# EAGLE board baseBoard2 (EAGLE 9.6.2)
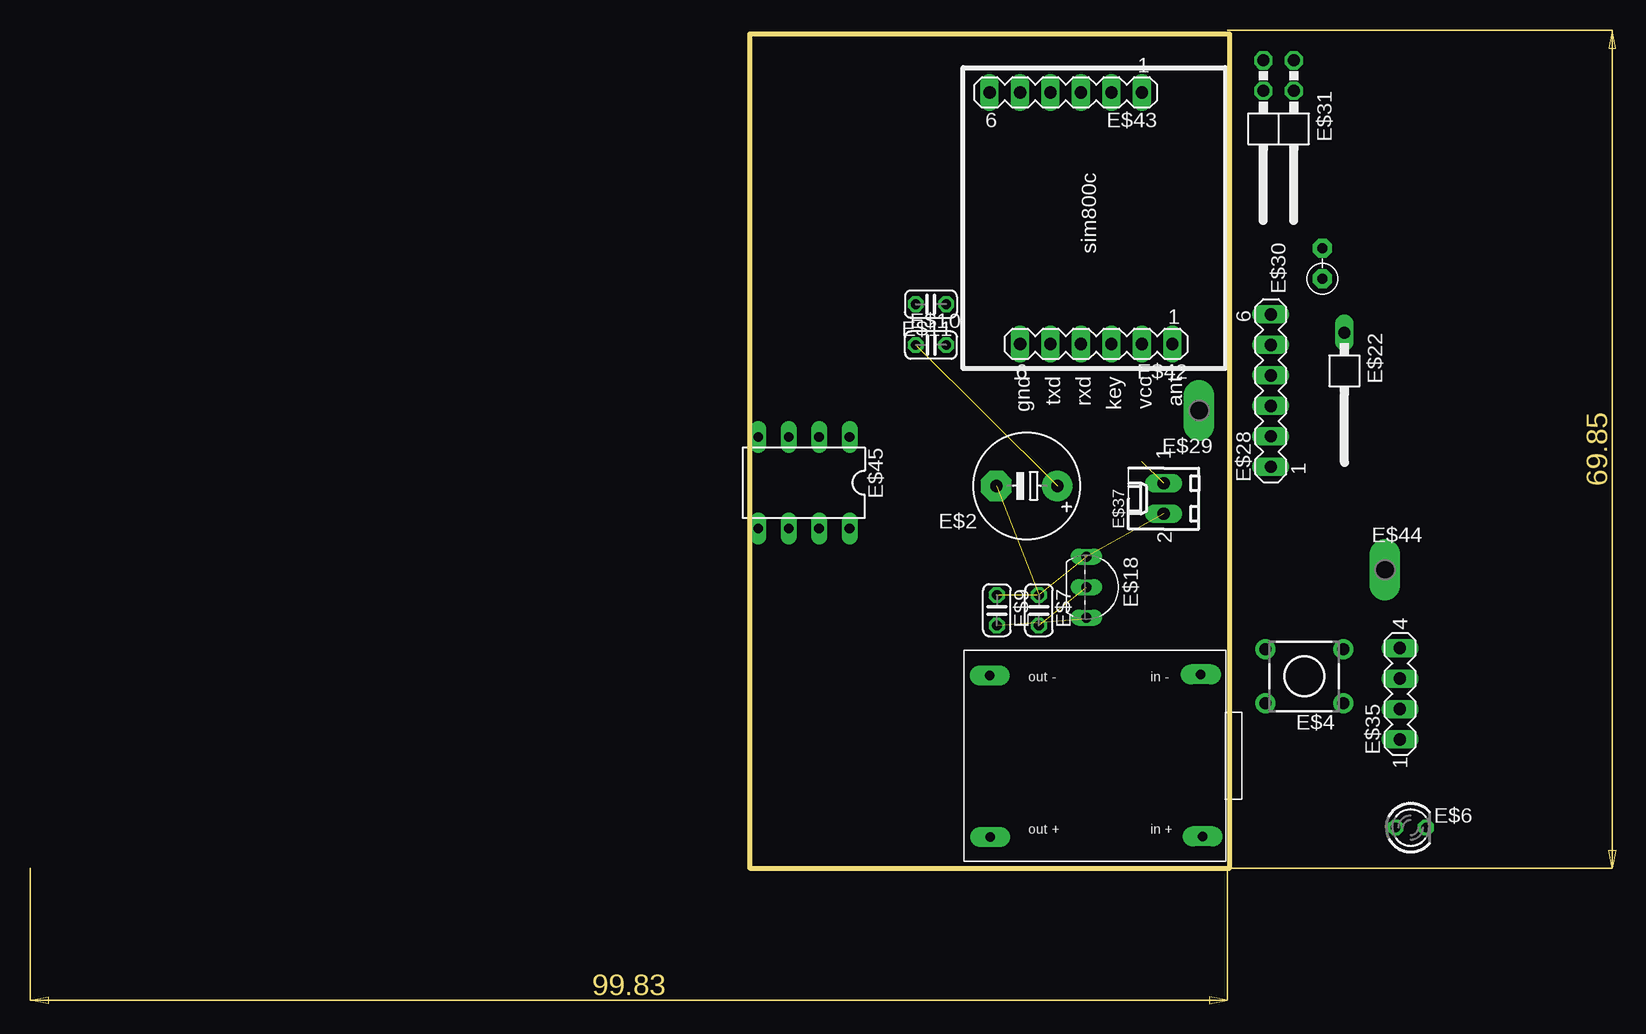
[diagram p0: board, top side]
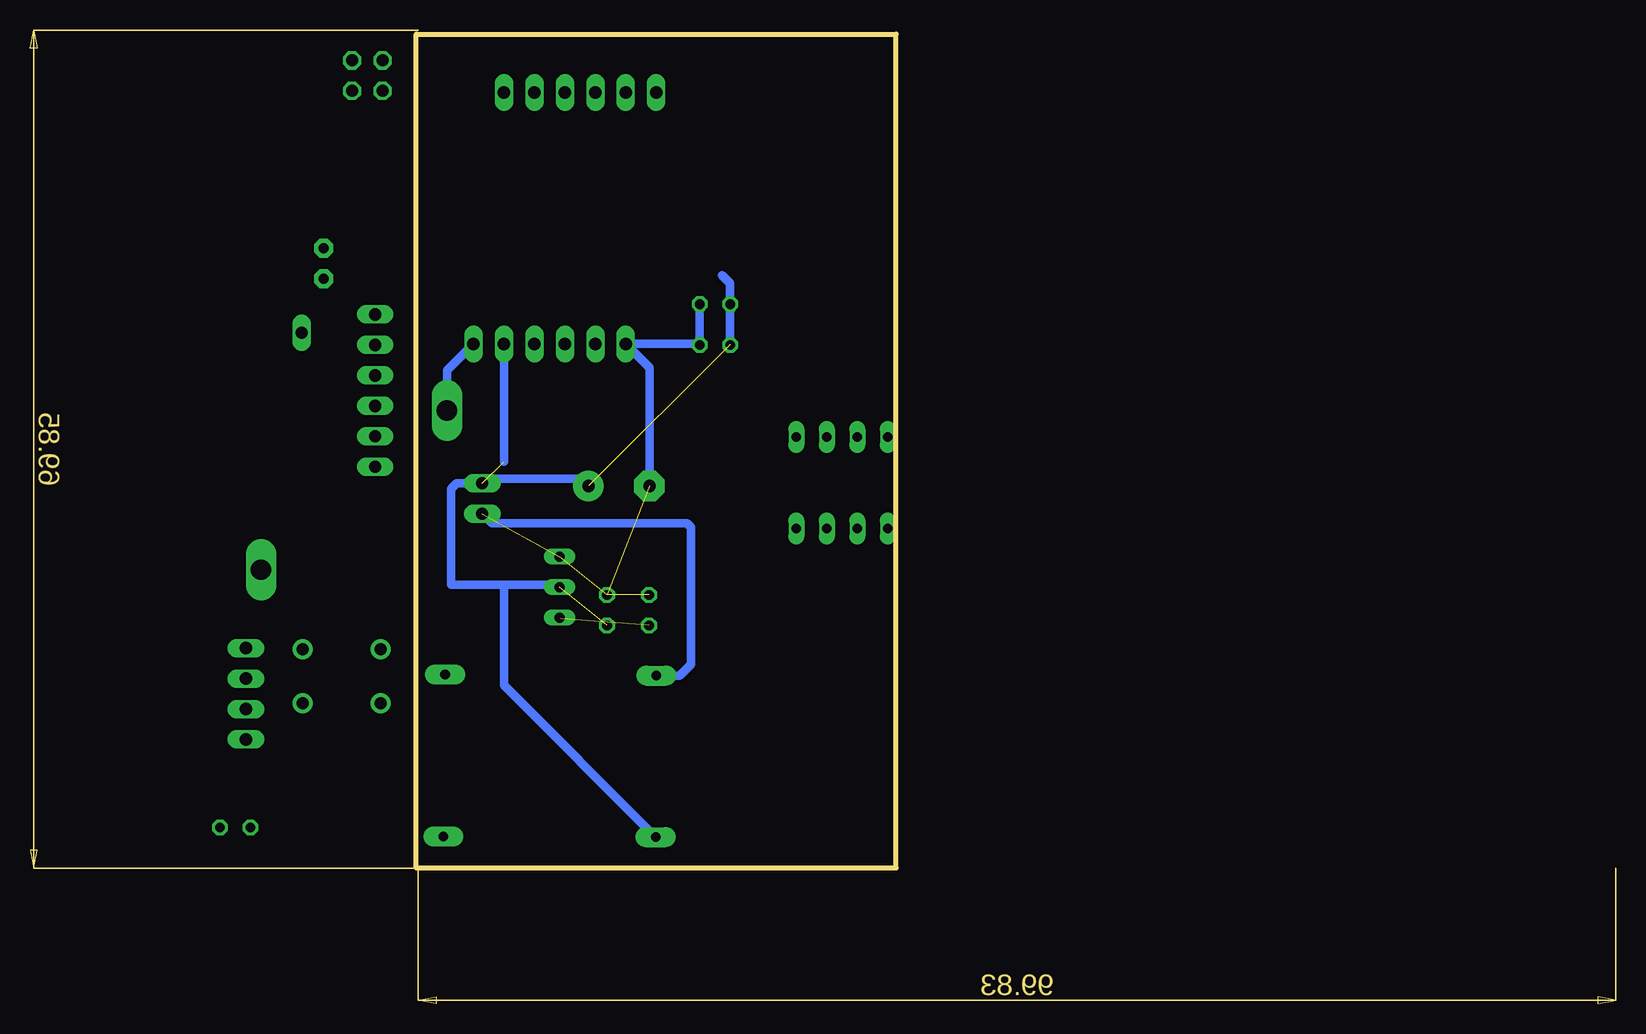
[diagram p1: board, bottom side, seen from below]

Size 40 x 69.5 mm. Coordinates in mm from the lower left corner, seen from the top.
Outline: 0,0 0,69.5 40,69.5 40,0 0,0
Copper layers (1*16): Top 0.035mm / dielectric 1.5mm / Bottom 0.035mm
Design rules "default *": minimum track width 0.7mm, minimum drill 24mil, track to track 8mil, track to pad 8mil, pad to pad 8mil, via to via 8mil, smd to smd 8mil, copper to edge 40mil, drill to drill 8mil, minimum pad ring 10mil, minimum via ring 8mil, stop-mask expansion 4mil, vias tented up to drill 0mil, thermal gap 10mil

## Footprints (pad centres in the part's own frame; a part is rotated, then mirrored left to right if it is on the bottom)
E5-8,5 = drill 1.016 pad 2.54: + -2.54,0 | drill 1.016 pad 2.54 octagon: - 2.54,0
TL1105 = drill 1 pad 1.676: 1 -2.25,3.25; 2 2.25,3.25; 3 -2.25,-3.25; 4 2.25,-3.25
LED3MM = drill 0.813 octagon: A -1.27,0; K 1.27,0
C025-024X044 = drill 0.813 octagon: 1 -1.27,0; 2 1.27,0
TO92- = drill 0.813 long: 1 2.54,0; 2 0,0; 3 -2.54,0
1X01/90 = drill 1.016 long: 1 -1.27,-3.81
MA06-1 = drill 1.016 long: 1 -6.35,0; 2 -3.81,0; 3 -1.27,0; 4 1.27,0; 5 3.81,0; 6 6.35,0
P1-17Y = drill 1.702 pad 2.121 long: TP 0,0
RS-2,5 = drill 0.813 pad 1.6 octagon: 1 -1.27,0; 2 1.27,0
2X02/90 = drill 1.016 octagon: 1 -1.27,-6.35; 2 -1.27,-3.81; 3 1.27,-6.35; 4 1.27,-3.81
MA04-1 = drill 1.016 long: 1 -3.81,0; 2 -1.27,0; 3 1.27,0; 4 3.81,0
6410-02 = drill 1.016 long: 1 1.27,0; 2 -1.27,0
LIPO_CHARGER = drill 0.8 pad 1.676 long: P$5 -8.3,6.85; P$6 9.3,6.95; P$7 -8.25,-6.6; P$8 9.45,-6.55
DIL08 = drill 0.813 long: 1 -3.81,-3.81; 2 -1.27,-3.81; 3 1.27,-3.81; 4 3.81,-3.81; 5 3.81,3.81; 6 1.27,3.81; 7 -1.27,3.81; 8 -3.81,3.81

## Placement (x,y rotation side)
E$2  [E5-8,5]  23.1,31.86 180 top
E$4  [TL1105]  46.22,15.98 90 top
E$6  [LED3MM]  55.09,3.39 0 top  (outside the outline)
E$7  1uF  [C025-024X044]  24.1,21.5 270 top
E$9  1uF  [C025-024X044]  20.6,21.5 270 top
E$10  100nF  [C025-024X044]  15.1,43.6 0 top
E$11  10uF  [C025-024X044]  15.1,47 180 top
E$18  [TO92-]  28.06,23.42 270 top
E$22  [1X01/90]  48.3,40.8 180 top  (outside the outline)
E$28  [MA06-1]  43.43,39.79 90 top  (outside the outline)
E$29  [P1-17Y]  37.45,38.13 180 top
E$30  [RS-2,5]  47.73,50.4 90 top  (outside the outline)
E$31  [2X02/90]  44.08,60.97 180 top
E$35  [MA04-1]  54.2,14.54 90 top  (outside the outline)
E$37  [6410-02]  34.5,30.8 90 top
E$41  [LIPO_CHARGER]  28.3,9.2 0 top
E$42  [MA06-1]  28.88,43.69 180 top
E$43  [MA06-1]  26.34,64.65 180 top
E$44  [P1-17Y]  52.95,24.87 0 top  (outside the outline)
E$45  [DIL08]  4.51,32.12 180 top

## Library data of the parts
E$2 = ref-packages-longpad
E$4 = switch
E$6 = led
E$7 E$9-E$11 = rcl
E$18 = transistor-fet
E$22 E$31 = pinhead
E$28 E$35 E$42 E$43 = con-lstb
E$29 E$44 = testpad
E$30 = discrete
E$37 = con-molex
E$41 = LSGPackages
E$45 = 74xx-us

## Nets
GND: E$2.- E$7.1 E$9.1 E$10.2 E$11.1 E$18.3 E$37.2 E$41.P$5 E$42.6
S$7: E$2.+ E$7.2 E$10.1 E$11.2 E$18.2 E$37.1 E$41.P$7 E$42.2
S$8: E$42.5
S$9: E$42.4
S$17: E$9.2 E$18.1
S$19: E$43.2
S$21: E$29.TP E$42.1

## Tracks (layer width: path | path; a pad name or v marks a point on that pad's centre or on a via)
GND  (4 unrouted)
  Bottom 0.7: E$2.- 20.56,39.37 20.56,41.72 E$42.6 16.46,43.69 E$10.2 E$11.1 | E$37.2 33.7,28.73 29.1,28.73 23.69,28.73 17.44,28.73 17.1,28.39 17.1,17 18.05,16.05 E$41.P$5
S$7  (3 unrouted)
  Bottom 0.7: 26.19,32.4 E$2.+ 26.25,32.47 34.1,32.47 E$37.1 36.63,32.07 37.1,31.6 37.1,23.6 32.7,23.6 | E$11.2 E$10.1 13.83,48.73 14.53,49.43 | E$18.2 28.24,23.6 32.7,23.6 | E$41.P$7 32.7,15.25 32.7,23.6 | E$42.2 32.69,33.88
S$17  (1 unrouted)
  Bottom 0.7: 27.98,20.8 E$18.1
S$21
  Bottom 0.7: E$42.1 37.45,41.48 E$29.TP

## Text on the board
tPlace: sim800c | gnd | txd | rxd | key | vcc | ant